# Altium PCB gitarukuranjadi.PCBDOC
Units mil, origin at the board's own origin, x right, y up, seen from the top; angles counter-clockwise.
Board outline 9670 x 5425 mil, 2 copper layers (Top Layer, Bottom Layer); 62 components, 44 nets, 204 pads, 7 vias.
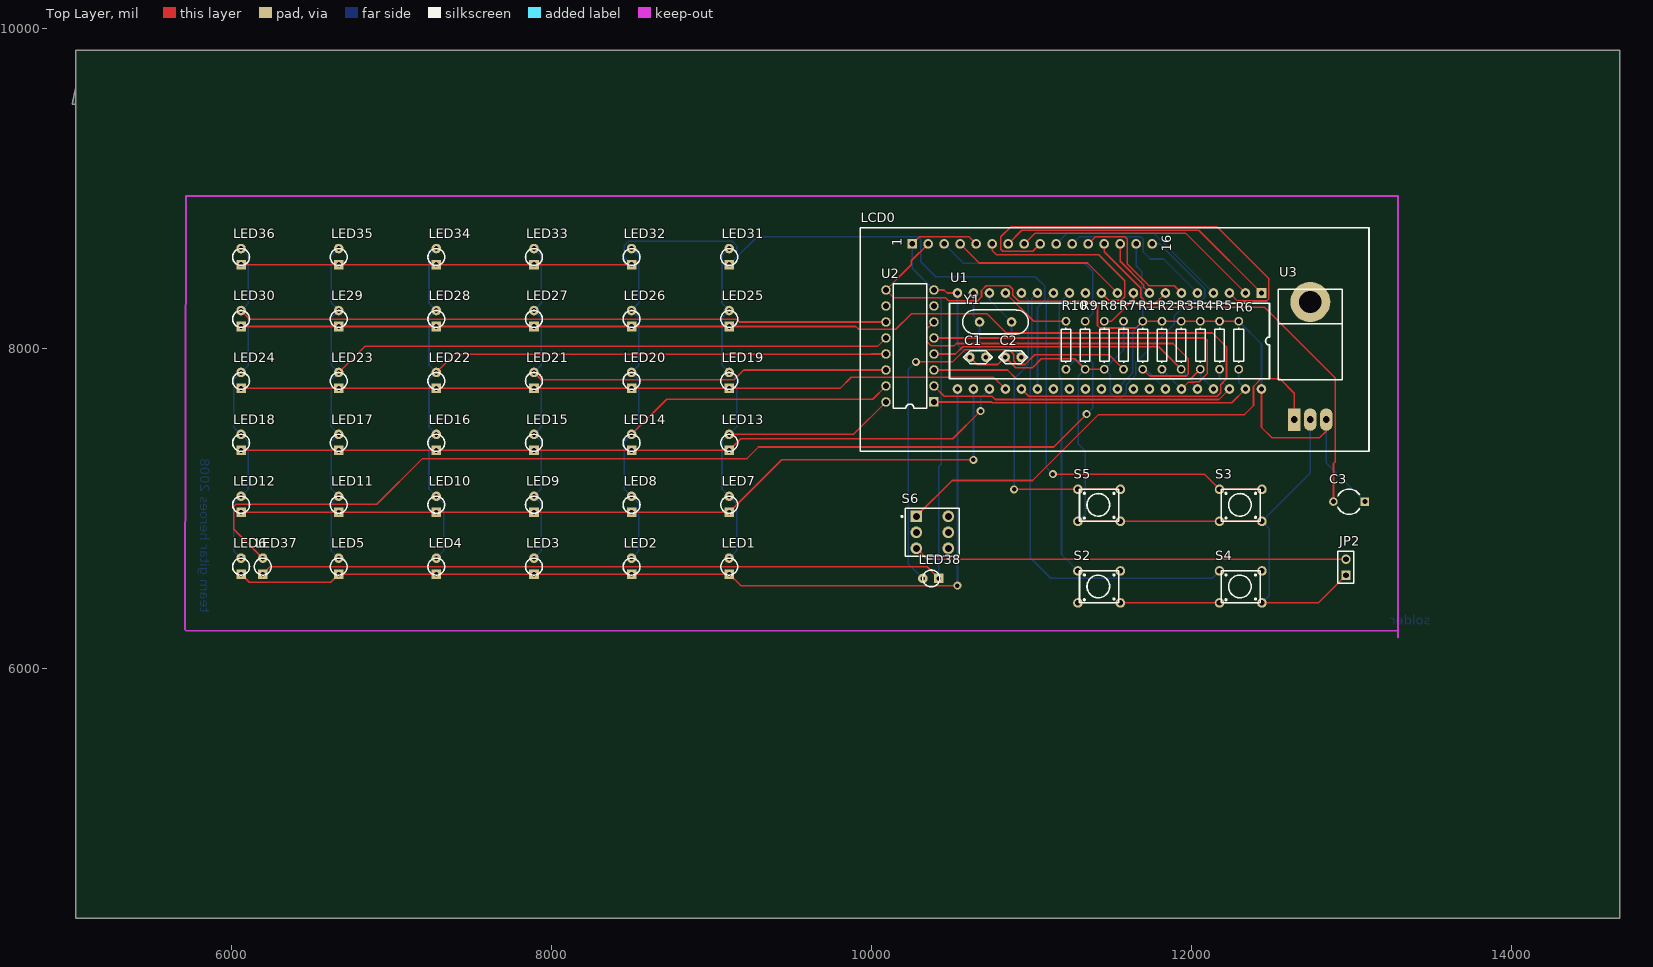
[diagram p0: Top Layer view]
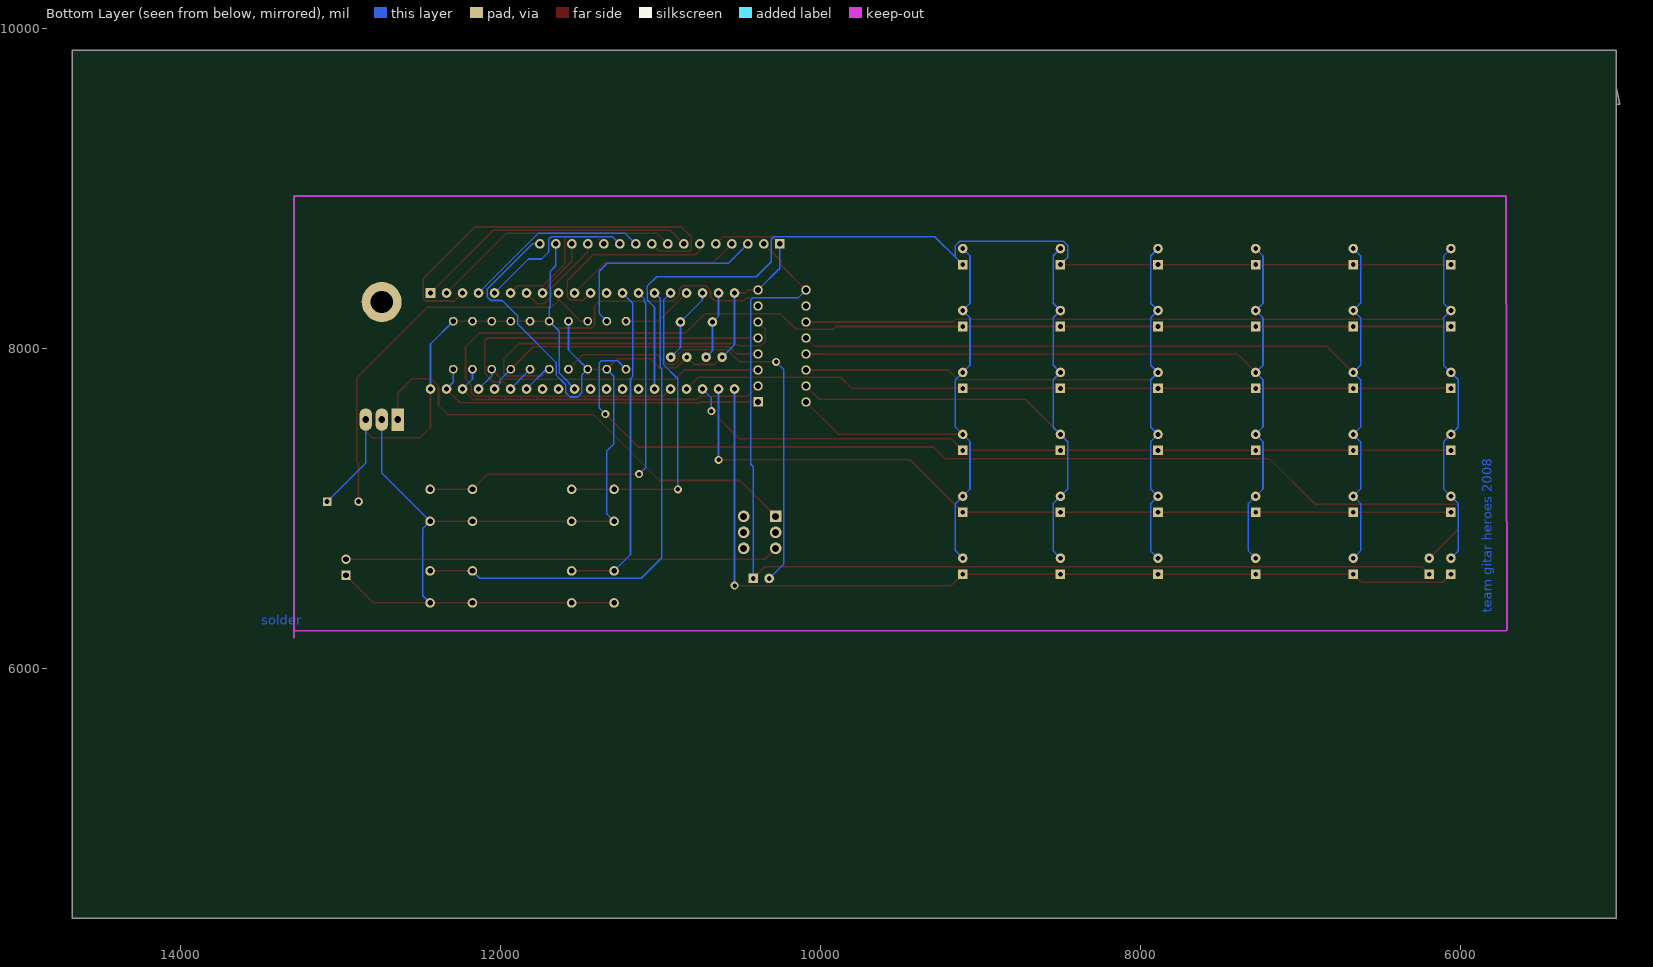
[diagram p1: Bottom Layer view, seen from below]

## Layer stack, top to bottom
Top Layer: signal copper 1.4
Dielectric: dielectric 12.6, FR-4, Dk 4.8
Bottom Layer: signal copper 1.4

## Board outline
5025,9630 5025,4435 14675,4435 14675,9860 5025,9860 5025,9525 5005,9525

## Design rules (kind name [scope] priority, off if disabled: settings)
Clearance [All] p1: gap=10
ComponentClearance [All] p1: gap=10 collisioncheckmode=0
PolygonConnect [All] p1: connectstyle=Relief reliefconductorwidth=10 reliefentries=4 polygonreliefangle="90 Angle"
RoomDefinition gitarukuranjadi [InComponentClass('gitarukuranjadi')] p1: confinementstyle=ConfineIn formatcopy=TRUE outline 0,0 2000,0 2000,1000 0,1000
RoutingLayers [All] p1: top layer=Horizontal bottom layer=Vertical
RoutingVias [All] p1: holewidth=28 width=50 viastyle="Through Hole" minholewidth=28 minwidth=50 maxholewidth=28 maxwidth=50
SolderMaskExpansion [All] p1: expansion=4
TestPointUsage [All] p1: valid=0 allowmultiple=FALSE
Testpoint [All] p1: side=15 testpointundercomponent=TRUE minsize=40 maxsize=100 preferedsize=60 minholesize=0 maxholesize=40 preferedholesize=32 testpointgrid=1 style=1023 order=1234567890
Width [All] p1: maxlimit=10 minlimit=10 preferedwidth=10
16 further rules are at their usual default settings.

## Components (designator, comment, footprint, x,y, rotation, side; value= is the part's Value field where it differs from the comment)
C1 "cap 33pF" "cap 22/33uF" 11014.63,7942.72 r180 top
C2 "cap 33pF" "cap 22/33uF" 11234.63,7942.72 r180 top
C3 "Cap2" CAPR5-4X5 12985.02,7039.84 r180 top
JP2 "Header 2" HDR1X2 12965.02,6579.84 r90 top
LCD0 "LCD 16X2" "LCD 16X2" 12854.63,10807.72 r90 top
LE29 "LED kecil" "LED kecil" 6569.39,8234.27 r90 top
LED1 "LED kecil" "LED kecil" 9010.08,6686.3 r90 top
LED2 "LED kecil" "LED kecil" 8399.91,6686.3 r90 top
LED3 "LED kecil" "LED kecil" 7789.73,6686.3 r90 top
LED4 "LED kecil" "LED kecil" 7179.56,6686.3 r90 top
LED5 "LED kecil" "LED kecil" 6569.39,6686.3 r90 top
LED6 "LED kecil" "LED kecil" 5959.21,6686.3 r90 top
LED7 "LED kecil" "LED kecil" 9010.08,7073.29 r90 top
LED8 "LED kecil" "LED kecil" 8399.91,7073.29 r90 top
LED9 "LED kecil" "LED kecil" 7789.73,7073.29 r90 top
LED10 "LED kecil" "LED kecil" 7179.56,7073.29 r90 top
LED11 "LED kecil" "LED kecil" 6569.39,7073.29 r90 top
LED12 "LED kecil" "LED kecil" 5959.21,7073.29 r90 top
LED13 "LED kecil" "LED kecil" 9010.08,7460.28 r90 top
LED14 "LED kecil" "LED kecil" 8399.91,7460.28 r90 top
LED15 "LED kecil" "LED kecil" 7789.73,7460.28 r90 top
LED16 "LED kecil" "LED kecil" 7179.56,7460.28 r90 top
LED17 "LED kecil" "LED kecil" 6569.39,7460.28 r90 top
LED18 "LED kecil" "LED kecil" 5959.21,7460.28 r90 top
LED19 "LED kecil" "LED kecil" 9010.08,7847.28 r90 top
LED20 "LED kecil" "LED kecil" 8399.91,7847.28 r90 top
LED21 "LED kecil" "LED kecil" 7789.73,7847.28 r90 top
LED22 "LED kecil" "LED kecil" 7179.56,7847.28 r90 top
LED23 "LED kecil" "LED kecil" 6569.39,7847.28 r90 top
LED24 "LED kecil" "LED kecil" 5959.21,7847.28 r90 top
LED25 "LED kecil" "LED kecil" 9010.08,8234.27 r90 top
LED26 "LED kecil" "LED kecil" 8399.91,8234.27 r90 top
LED27 "LED kecil" "LED kecil" 7789.73,8234.27 r90 top
LED28 "LED kecil" "LED kecil" 7179.56,8234.27 r90 top
LED30 "LED kecil" "LED kecil" 5959.21,8234.27 r90 top
LED31 "LED kecil" "LED kecil" 9010.08,8621.26 r90 top
LED32 "LED kecil" "LED kecil" 8399.91,8621.26 r90 top
LED33 "LED kecil" "LED kecil" 7789.73,8621.26 r90 top
LED34 "LED kecil" "LED kecil" 7179.56,8621.26 r90 top
LED35 "LED kecil" "LED kecil" 6569.39,8621.26 r90 top
LED36 "LED kecil" "LED kecil" 5959.21,8621.26 r90 top
LED37 "LED kecil" "LED kecil" 6094.89,6686.3 r90 top
LED38 "LED kecil" "LED kecil" 10320,6460 r180 top
R1 "Res1" AXIAL-0.3 11694.63,8017.72 r270 top
R2 "Res1" AXIAL-0.3 11814.63,8017.72 r270 top
R3 "Res1" AXIAL-0.3 11934.63,8017.72 r270 top
R4 "Res1" AXIAL-0.3 12054.63,8017.72 r270 top
R5 "Res1" AXIAL-0.3 12174.63,8017.72 r270 top
R6 "Res1" AXIAL-0.3 12294.63,8017.72 r270 top
R7 "Res1" AXIAL-0.3 11574.63,8017.72 r270 top
R8 "Res1" AXIAL-0.3 11454.63,8017.72 r270 top
R9 "Res1" AXIAL-0.3 11334.63,8017.72 r270 top
R10 "Res1" AXIAL-0.3 11214.63,8017.72 r270 top
S2 "pushbutton" pushbutton 11854.63,6507.72 r0 top
S3 "pushbutton" pushbutton 12739.63,7017.72 r0 top
S4 "pushbutton" pushbutton 12739.63,6507.72 r0 top
S5 "pushbutton" pushbutton 11854.63,7017.72 r0 top
S6 "SW-DPDT" DPDT-6 10379.63,6847.72 r0 top
U1 "8051" "8051 40 pin" 10734.63,6597.72 r270 top
U2 "ULN2003A" A16 10239.63,8012.72 r90 top
U3 "7805" 78XX/79XX 12259.63,7792.72 r90 top
Y1 "XTAL" XTAL 10774.63,8062.72 r0 top

## Footprints (in the part's own frame and the unit in brackets; to place one, negate y for a bottom-side part, rotate by r counter-clockwise, add the part's x,y. Pads: shape width x height; smd on the part's side, far side on the other; paste and mask are expansions set on the pad)
78XX/79XX [mil]
  round 250 hole 140: 0(495,-482)
  rect 140x80 hole 42: 1(-240,-382)
  oval 140x80 hole 42: 2(-240,-482) 3(-240,-582)
  silkscreen extent 10,-682 575,-282
"8051 40 pin" [mil]
  rect 60x60 hole 33: 1(-1746,1702)
  round 60 hole 33: 2(-1746,1602) 3(-1746,1502) 4(-1746,1402) 5(-1746,1302) 6(-1746,1202) 7(-1746,1102) 8(-1746,1002) 9(-1746,902) 10(-1746,802) 11(-1746,702) 12(-1746,602) 13(-1746,502) 14(-1746,402) 15(-1746,302) 16(-1746,202) 17(-1746,102) 18(-1746,2) 19(-1746,-98) 20(-1746,-198) 21(-1146,-198) 22(-1146,-98) 23(-1146,2) 24(-1146,102) 25(-1146,202) 26(-1146,302) 27(-1146,402) 28(-1146,502) 29(-1146,602) 30(-1146,702) 31(-1146,802) 32(-1146,902) 33(-1146,1002) 34(-1146,1102) 35(-1146,1202) 36(-1146,1302) 37(-1146,1402) 38(-1146,1502) 39(-1146,1602) 40(-1146,1702)
  silkscreen extent -1681,-248 -1211,1752
A16 [mm] "DIP; 16 Leads; Row Spacing 7.62 mm; Pitch 2.54 mm"
  rect 1.5x1.5 hole 0.9: 1(-8.89,-3.81)
  round 1.5 hole 0.9: 2(-6.35,-3.81) 3(-3.81,-3.81) 4(-1.27,-3.81) 5(1.27,-3.81) 6(3.81,-3.81) 7(6.35,-3.81) 8(8.89,-3.81) 9(8.89,3.81) 10(6.35,3.81) 11(3.81,3.81) 12(1.27,3.81) 13(-1.27,3.81) 14(-3.81,3.81) 15(-6.35,3.81) 16(-8.89,3.81)
  silkscreen extent -9.85,-2.65 9.85,2.65
AXIAL-0.3 [mm]
  round 1.4 hole 0.85: 1(-3.81,0) 2(3.81,0)
  silkscreen extent -2.77,-0.76 2.77,0.76
"cap 22/33uF" [mil]
  round 60 hole 28: 1(300,0) 2(400,0)
  silkscreen extent 260,-40 440,40
CAPR5-4X5 [mm]
  rect 1.35x1.35 hole 0.8: 1(-2.5,0)
  round 1.35 hole 0.8: 2(2.5,0)
  silkscreen extent -1.69,-2 1.82,2
DPDT-6 [mm]
  rect 1.85x1.85 hole 1.1: 1(-2.54,2.54)
  round 1.85 hole 1.1: 2(-2.54,0) 3(-2.54,-2.54) 4(2.54,-2.54) 5(2.54,0) 6(2.54,2.54)
  silkscreen extent -4.96,-3.81 4.28,3.81
HDR1X2 [mm] "Connector; Header; 2 Position"
  rect 1.5x1.5 hole 0.9: 1(0,0)
  round 1.5 hole 0.9: 2(2.54,0)
  silkscreen extent -1.27,-1.27 3.81,1.27
"LCD 16X2" [mil]
  rect 60x60 hole 35: 1(-2157,2601)
  round 60 hole 35: 2(-2157,2501) 3(-2157,2401) 4(-2157,2301) 5(-2157,2201) 6(-2157,2101) 7(-2157,2001) 8(-2157,1901) 9(-2157,1801) 10(-2157,1701) 11(-2157,1601) 12(-2157,1501) 13(-2157,1401) 14(-2157,1301) 15(-2157,1201) 16(-2157,1101)
  silkscreen extent -3452,-254 -2057,2926
"LED kecil" [mil]
  rect 60x60 hole 30: 1(-100,-100)
  round 60 hole 30: 2(0,-100)
  silkscreen extent -106,-153 0,-47
pushbutton [mil]
  round 60 hole 35: 1(-565,-101) 1(-300,-101) 2(-565,99) 2(-300,99)
  silkscreen extent -555,-101 -310,99
XTAL [mil]
  round 60 hole 30: 1(-100,100) 2(100,100)
  silkscreen extent -205,25 205,175

## Part data
C1 C2: library part "cap 22/33uF"
C3: "Capacitor"
JP2: "Header, 2-Pin"
R1 R2 R3 R4 R5 R6 R7 R8 R9 R10: "Resistor"
S6: "Double-Pole, Double-Throw Switch"
U1: library part "8051 40 pin"
U2: "High-Voltage, High-Current Darlington Array"
U3: library part 7805/7809/7812/7905/7909/7912

## Via types
v1: diameter 50, hole 28, Top Layer to Bottom Layer, 7 vias

## Nets (pads, with @x,y where several pads share a name; then routed paths per layer and width w, separated by ;. In a path a pad name is that pad's centre, name@x,y a point inside that pad or via, vN(x,y) a via of type N, cw(c..) or ccw(c..) an arc to the next point about the centre after c; other vN are vias at no path point)
10: LCD0.7 U1.1 | length 1780.8
  Top Layer w10: LCD0.7 10938.91,8736 12044.34,8736 U1.1
11: LCD0.8 U1.2 | length 1564.2
  Top Layer w10: LCD0.8 11018.91,8716 11964.34,8716 U1.2
12: LCD0.9 U1.3 | length 2579.7
  Top Layer w10: LCD0.9 11007.91,8605 10820,8605 10808,8617 10808,8695 10869,8756 12161,8756 12482,8435 12482,8306 12470,8294 12286.34,8294 U1.3
13: LCD0.10 U1.4 | length 1164.2
  Bottom Layer w10: LCD0.10 11218.91,8716 11764.34,8716 U1.4
14: LCD0.11 U1.5 | length 994.5
  Bottom Layer w10: LCD0.11 11298.91,8696 11683,8696 11699,8680 11699,8600 11743,8556 11824.34,8556 U1.5
15: LCD0.12 U1.6 | length 838.9
  Top Layer w10: LCD0.12 11398.91,8696 11583,8696 11599,8680 11599,8524.29 11734.29,8389 11891.34,8389 U1.6
16: LCD0.13 U1.7 | length 626.2
  Top Layer w10: LCD0.13 11453.63,8601.37 11682,8373 11682,8320 11726,8276 11768.91,8276 U1.7
17: LCD0.14 U1.8 | length 382.8
  Top Layer w10: LCD0.14 11553.63,8541.37 11702,8393 11702,8378.34 U1.8
30: LCD0.4 U1.10 | length 1110.2
  Top Layer w10: LCD0.4 10673.34,8531 11349.34,8531 U1.10
31: LCD0.6 U1.11 | length 1222.2
  Top Layer w10: LCD0.6 10753.63,8609.37 10780,8583 11420,8583 11582,8421 11582,8320 11560,8298 11482.34,8298 U1.11
32: U1.12
33: S2.2 U1.13 | length 2077.5
  Top Layer w10: S2.2@11289.63,6606.72 S2.2@11554.63,6606.72
  Bottom Layer w10: U1.13 11172,8279.09 11172,7822 11187,7807 11187,6709.34 S2.2@11289.63,6606.72
34: S3.2 U1.14 | length 2514.7
  Top Layer w10: v1(11133,7211) 12080.34,7211 12174.63,7116.72 S3.2@12439.63,7116.72
  Bottom Layer w10: v1(11133,7211) 11091,7253 11091,8279 11102,8290 11102,8309.09 U1.14
35: S4.2 U1.15 | length 3194.2
  Top Layer w10: S4.2@12174.63,6606.72 S4.2@12439.63,6606.72
  Bottom Layer w10: U1.15 11000,8307.09 11000,7878 10991,7869 10991,6689 11119,6561 12128.91,6561 S4.2@12174.63,6606.72
36: S5.2 U1.16 | length 1945.5
  Top Layer w10: v1(10891,7116.72) 11289.63,7116.72 S5.2@11554.63,7116.72
  Bottom Layer w10: v1(10891,7116.72) 10891,7808.37 10980,7897.37 10980,8300.34 U1.16
37: R10.1 U1.17 | length 450.9
  Top Layer w10: U1.17 11012.63,8167.72 R10.1
B1: R6.2 U1.39 U2.1 | length 2125.9
  Top Layer w10: U2.1 10752,7662.72 10756.72,7658 12250.91,7658 U1.39
  Bottom Layer w10: R6.2 12294.63,7785.72 U1.39
B2: R5.2 U1.38 U2.2 | length 2059
  Top Layer w10: U2.2 10454.34,7698 10752,7698 10772,7678 12170.91,7678 U1.38
  Bottom Layer w10: R5.2 12174.63,7805.72 U1.38
B3: R4.2 U1.37 U2.3 | length 1872.9
  Top Layer w10: U2.3 10850,7862.72 10907.72,7805 11991.91,7805 R4.2
  Bottom Layer w10: R4.2 12054.63,7825.72 U1.37
B4: R3.2 U1.36 U2.4 | length 1788.1
  Top Layer w10: U2.4 10523.72,7962.72 10569,8008 11794.34,8008 R3.2
  Bottom Layer w10: R3.2 12005,7797.34 12005,7775.34 U1.36
B5: R2.2 U1.35 U2.5 | length 2298.3
  Top Layer w10: U2.5 12083.28,8062.72 12098,8048 12098,7840 12047,7789 12021,7789 12017,7785 11977.91,7785 U1.35
  Bottom Layer w10: R2.2 11886,7796.34 11886,7794.34 U1.35
B6: R1.2 U1.34 U2.6 | length 2428.1
  Top Layer w10: U2.6 10345,8118.09 10345,8040 10372,8013 10515,8013 10530,8028 11884,8028 11978,7934 11978,7835 11968,7825 11737.34,7825 R1.2
  Bottom Layer w10: R1.2 11712.63,7867.72 U1.34
G1: LED1.2 LED7.2 LED13.2 LED19.2 LED25.2 LED31.2 U2.16 | length 3186.5
  Top Layer w10: LED13.2 9887.19,7460.28 U2.16
  Bottom Layer w10: LED1.2 9156,6732.22 9156,7027.37 LED7.2 9065,7118.37 9065,7415.21 LED13.2 9156,7506.21 9156,7801.35 LED19.2 9065,7892.35 9065,8189.19 LED25.2 9065,8279.35 9065,8576.18 LED31.2
G2: LED2.2 LED8.2 LED14.2 LED20.2 LED26.2 LED32.2 U2.15 | length 3837.4
  Top Layer w10: LED14.2 8719.62,7680 10006.91,7680 U2.15
  Bottom Layer w10: LED2.2 8545,6731.39 8545,7028.2 LED8.2 8454,7119.2 8454,7414.38 LED14.2 8545,7505.38 8545,7802.18 LED20.2 8545,7892.37 8545,8189.17 LED26.2 8545,8279.36 8545,8576.17 LED32.2
G3: LED3.2 LED9.2 LED15.2 LED21.2 LED27.2 LED33.2 U2.14 | length 4366.3
  Top Layer w10: LED21.2 7935.01,7802 9140,7802 9200.72,7862.72 U2.14
  Bottom Layer w10: LED3.2 7935,6731.57 7935,7028.02 LED9.2 7935,7118.56 7935,7415.02 LED15.2 7935,7505.55 7935,7802.01 LED21.2 7935,7892.54 7935,8189 LED27.2 7935,8279.54 7935,8575.99 LED33.2
G4: LED4.2 LED10.2 LED16.2 LED22.2 LED28.2 LED34.2 U2.13 | length 4981.5
  Top Layer w10: LED22.2 7394.28,7962 9997.28,7962 9998,7962.72 U2.13
  Bottom Layer w10: LED4.2 7325,6731.74 7325,7027.85 LED10.2 7234,7118.85 7234,7414.73 LED16.2 7234,7505.84 7234,7801.72 LED22.2 7234,7892.83 7234,8188.71 LED28.2 7234,8279.83 7234,8575.7 LED34.2
G5: LE29.2 LED5.2 LED11.2 LED17.2 LED23.2 LED35.2 U2.12 | length 5632.4
  Top Layer w10: LED23.2 6832.11,8010 10036.91,8010 U2.12
  Bottom Layer w10: LED5.2 6624,6731.69 6624,7027.91 LED11.2 6624,7118.68 6624,7414.9 LED17.2 6624,7505.67 6624,7801.89 LED23.2 6624,7892.66 6624,8188.88 LE29.2 6624,8279.65 6624,8575.87 LED35.2
G6: LED6.2 LED12.2 LED18.2 LED24.2 LED30.2 LED36.2 U2.11 | length 6183.7
  Top Layer w10: LED30.2 6113.48,8180 9156,8180 9173.28,8162.72 U2.11
  Bottom Layer w10: LED6.2 6014,6731.51 6014,7028.08 LED12.2 6105,7119.08 6105,7414.5 LED18.2 6014,7505.5 6014,7802.06 LED24.2 6105,7893.06 6105,8188.48 LED30.2 6105,8280.06 6105,8575.47 LED36.2
GND: C1.2 C2.2 JP2.1 LCD0.1 LCD0.5 LCD0.16 R7.1 R8.2 R9.2 S2.1 S3.1 S4.1 S5.1 U1.20 U2.8 U3.2 | length 9510.3
  Top Layer w10: LCD0.1 10298.91,8696 10608.34,8696 LCD0.5 ; U2.8 10453,8362.72 10472,8343.72 U1.20 ; C1.2 10660.34,7897 10788.91,7897 C2.2 10900.34,7877 11005,7877 11061,7933 11269.34,7933 R9.2 R8.2 ; S2.1@11289.63,6406.72 11554.63,6406.72 12174.63,6406.72 12439.63,6406.72 12791.89,6406.72 JP2.1 ; S5.1@11289.63,6916.72 11554.63,6916.72 12174.63,6916.72 S3.1@12439.63,6916.72
  Bottom Layer w10: LCD0.1 10253.63,8498.72 U2.8 ; U1.20 10536.63,8020.72 C1.2 ; S5.1@11289.63,6916.72 11335,6962.09 11335,7356 11291,7400 11291,7824.09 R9.2 ; R7.1 11574.63,7987.72 R8.2 11491,7831.34 11491,7720 11517,7694 11565,7694 11591,7720 11591,7770 11652,7831 11652,7909.93 11892,8149.93 11892,8200 11989,8297 12060,8297 12082,8319 12082,8369 11800.28,8650.72 LCD0.16 ; S4.1@12439.63,6406.72 12485,6452.09 12485,6871.34 12439.63,6916.72 12741.63,7218.72 U3.2
NetC1_1: C1.1 U1.19 Y1.1 | length 433.3
  Bottom Layer w10: U1.19 10636.63,8200.72 Y1.1 10674.63,7982.72 C1.1
NetC2_1: C2.1 U1.18 Y1.2 | length 483
  Bottom Layer w10: U1.18 10736.63,8300.72 Y1.2 10874.63,8002.72 C2.1
NetC3_2: C3.2 R8.1 U1.9 | length 2522.8
  Top Layer w10: R8.1 11500,8167.72 11636.63,8304.34 ; U1.9 11636.63,8304.34 ; C3.2 12886.59,7278.59 12897,7289 12897,7812 12455,8254 11680,8254 11636.63,8297.37 11636.63,8304.34
NetJP2_2: JP2.2 S6.3 | length 2713.5
  Top Layer w10: S6.3 10347.5,6679.84 JP2.2
NetLCD0_3: LCD0.3 R9.1 | length 1331
  Bottom Layer w10: LCD0.3 10574.34,8530 11332,8530 11382,8480 11382,8215.09 R9.1
NetLED37_2: LED37.2 R10.2 | length 6497.7
  Top Layer w10: LED37.2 6014,6867.19 6014,7010 6027,7023 6907,7023 7193,7309 9221,7309 9293,7381 11138,7381 v1(11344,7587)
  Bottom Layer w10: R10.2 11266.91,7920 11368.91,7920 11382,7906.91 11382,7625 v1(11344,7587)
NetLED38_2: LED38.2 R7.2 | length 2864.3
  Top Layer w10: v1(10277,7913) 10505.28,7913 10580.28,7988 10861.63,7988 10889,7960.63 10889,7920 10912,7897 10959.28,7897 11020.28,7958 11484.34,7958 R7.2
  Bottom Layer w10: v1(10277,7913) 10228,7864 10228,6652 LED38.2
NetS6_1: S6.1 U3.1 | length 2990
  Top Layer w10: S6.1 10503.91,7172 11006,7172 11418,7584 12331,7584 12387,7640 12387,7760 12434,7807 12552,7807 12641.63,7717.37 U3.1
R1: LED1.1 LED2.1 LED3.1 LED4.1 LED5.1 LED6.1 U1.21 | length 5777.3
  Top Layer w10: LED6.1 6109.51,6536 6619.09,6536 LED5.1 LED4.1 LED3.1 LED2.1 LED1.1 9181.38,6515 v1(10536.63,6515)
  Bottom Layer w10: v1(10536.63,6515) U1.21
R2: LED7.1 LED8.1 LED9.1 LED10.1 LED11.1 LED12.1 U1.22 | length 5155.9
  Top Layer w10: LED12.1 LED11.1 LED10.1 LED9.1 LED8.1 LED7.1 9437.79,7301 v1(10636.63,7301)
  Bottom Layer w10: v1(10636.63,7301) U1.22
R3: LED13.1 LED14.1 LED15.1 LED16.1 LED17.1 LED18.1 U1.23 | length 4884.3
  Top Layer w10: LED18.1 LED17.1 LED16.1 LED15.1 LED14.1 LED13.1 9182.79,7433 10508,7433 v1(10681,7606)
  Bottom Layer w10: v1(10681,7606) 10681,7688.09 U1.23
R4: LED19.1 LED20.1 LED21.1 LED22.1 LED23.1 LED24.1 U1.24 | length 4837.5
  Top Layer w10: LED24.1 LED23.1 LED22.1 LED21.1 LED20.1 LED19.1 9802.28,7747.28 9873,7818 10762.34,7818 U1.24
R5: LE29.1 LED25.1 LED26.1 LED27.1 LED28.1 LED30.1 U1.25 | length 7865.8
  Top Layer w10: LED30.1 LE29.1 LED28.1 LED27.1 LED26.1 LED25.1 9902,8134.27 9919.27,8117 10151,8117 10247,8213 10722,8213 10841,8094 12130,8094 12218,8006 12218,7807 12182,7771 12182,7720 12160,7698 10982.34,7698 U1.25
R6: LED31.1 LED32.1 LED33.1 LED34.1 LED35.1 LED36.1 U1.26 | length 6293.2
  Top Layer w10: LED36.1 LED35.1 LED34.1 LED33.1 LED32.1
  Bottom Layer w10: LED32.1 8454,8567.17 8454,8641 8480,8667 9129,8667 9156,8640 9156,8567.18 ; LED31.1 9156,8567.18 ; U1.26 11036.63,8254 11082,8299.37 11082,8387 11023,8446 10401,8446 10308,8539 10308,8680 10292,8696 9284.82,8696 9156,8567.18
VCC: C3.1 LCD0.2 LCD0.15 LED37.1 LED38.1 R1.1 R2.1 R3.1 R4.1 R5.1 R6.1 U1.31 U1.40 U2.9 U3.3 | length 12150.1
  Top Layer w10: LED37.1 6240.59,6632 10348,6632 LED38.1 ; LCD0.2 10248,8545.09 10248,8521.09 U2.9 10139.34,8313 10463,8313 10480,8296 10663,8296 10687,8320 10687,8360 10716,8389 10860,8389 10882,8367 10882,8330 10920,8292 11383,8292 11412,8263 11412,8140 11427,8125 11651.91,8125 R1.1 R2.1 R3.1 R4.1 R5.1 R6.1 ; U1.40 12436.63,7503.75 12500.37,7440 12801.63,7440 12841.63,7480 U3.3
  Bottom Layer w10: U2.9 10139.34,8313 10422,8313 10435,8300 10435,7273 10420,7258 LED38.1 ; U1.31 11568,7775.09 11568,7780 11632,7844 11632,8105.09 R1.1 11694.63,8252.37 11689,8258 11689,8478.63 11653.63,8514 LCD0.15 ; R6.1 12436.63,8025.72 U1.40 ; U3.3 12841.63,7281.66 C3.1
pads on no net: S6.2 S6.4 S6.5 S6.6 U1.27 U1.28 U1.29 U1.30 U1.32 U1.33 U2.7 U2.10 U3.0

## Keep-outs
Keep-Out Layer:
  lines w10: 5708.66,6240.16 5715,8950 13290.04,8950 13290.04,6190 ; 5715,6233.46 13290.04,6233.46

## Other copper
Bottom Layer:
  text "team gitar heroes 2008" at 5805,6345 h60 r270
  text "solder" at 13495,6270 h60

## Dimensions
6062.99,8562.99 to 6692.91,8562.99 on Top Layer
6043.31,8169.29 to 6043.31,8562.99 on Top Layer
6051.45,8582.68 to 9122.32,8523.62 on Top Layer
5964.57,8562.99 to 6122.05,6633.86 on Top Layer
5669.29,8945.15 to 5708.66,6228.62 on Top Layer
5711.5,8799.21 to 13309.93,8996.06 on Top Layer
5944.88,8950.15 to 5984.25,8556.45 on Top Layer
12903.39,8759.84 to 12903.39,8956.69 on Top Layer
13098.41,8707.24 to 13295.26,8707.24 on Top Layer

## Text inside footprints (layer, text, board x,y; h text height)
LCD0: Top Overlay "1" at 10188.63,8635.72 h60 r90; Top Overlay "16" at 11873.63,8600.72 h60 r90